# Altium PCB PCB-MAKEY_MAKEY_PTITTEAM_v1.4.PcbDoc
Units mil, origin at the board's own origin, x right, y up, seen from the top; angles counter-clockwise.
Board outline 3500 x 1950 mil, 2 copper layers (Top Layer, Bottom Layer); 49 components, 59 nets, 156 pads, 64 vias.
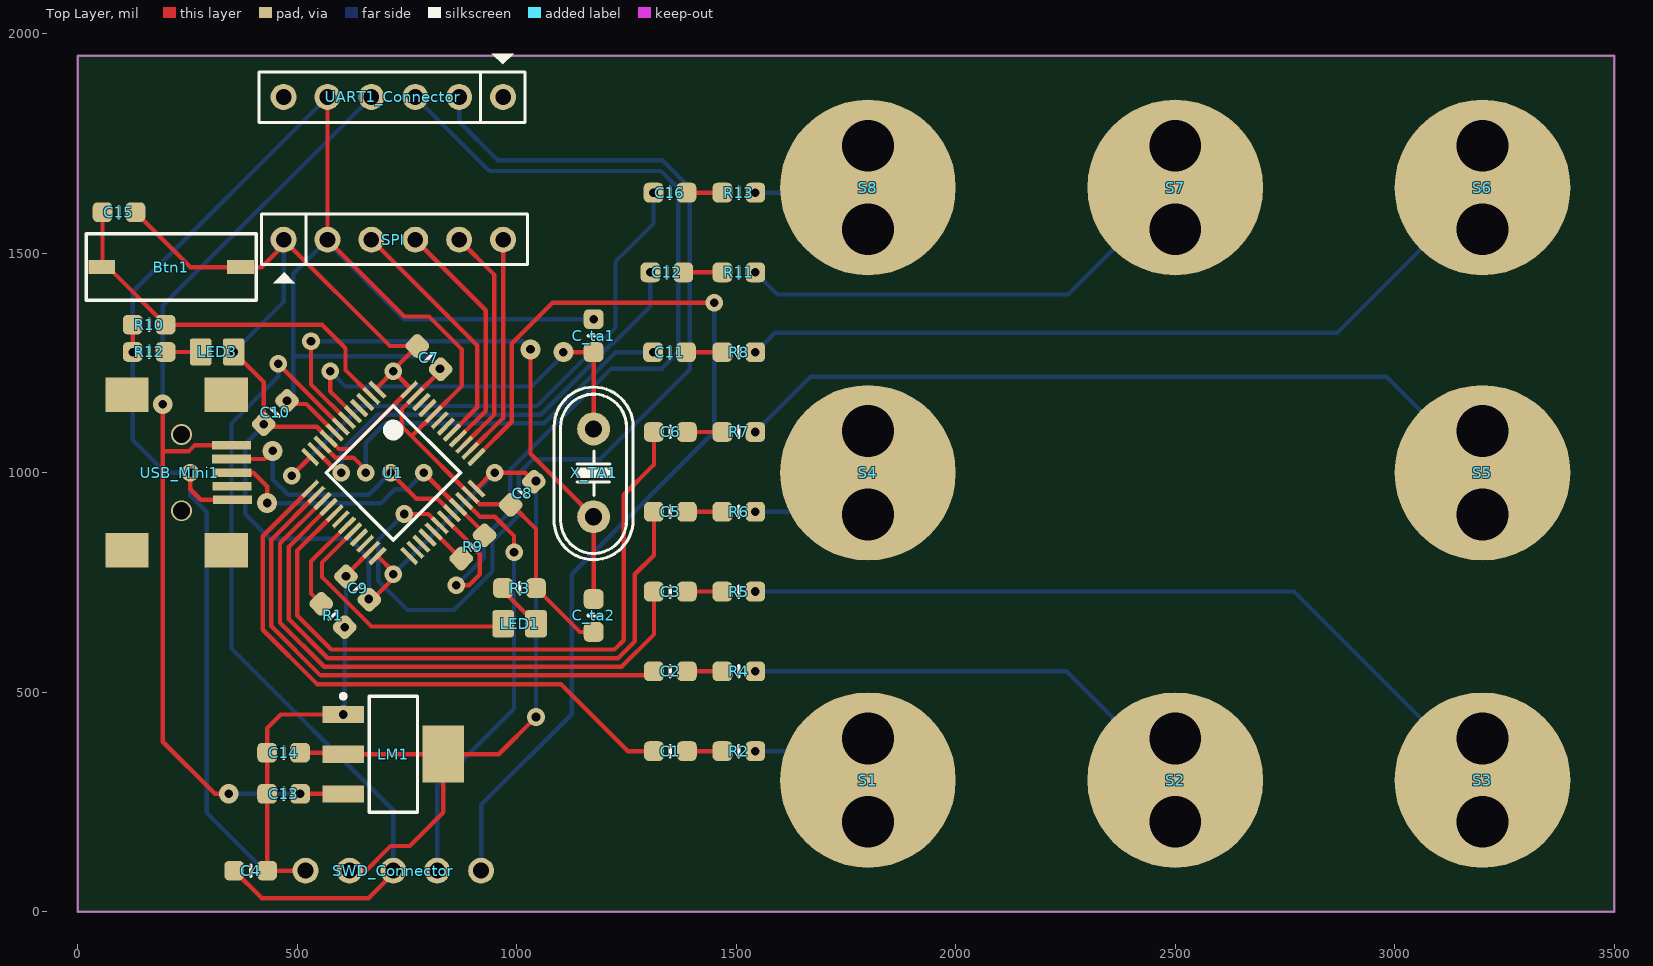
[diagram p0: Top Layer view]
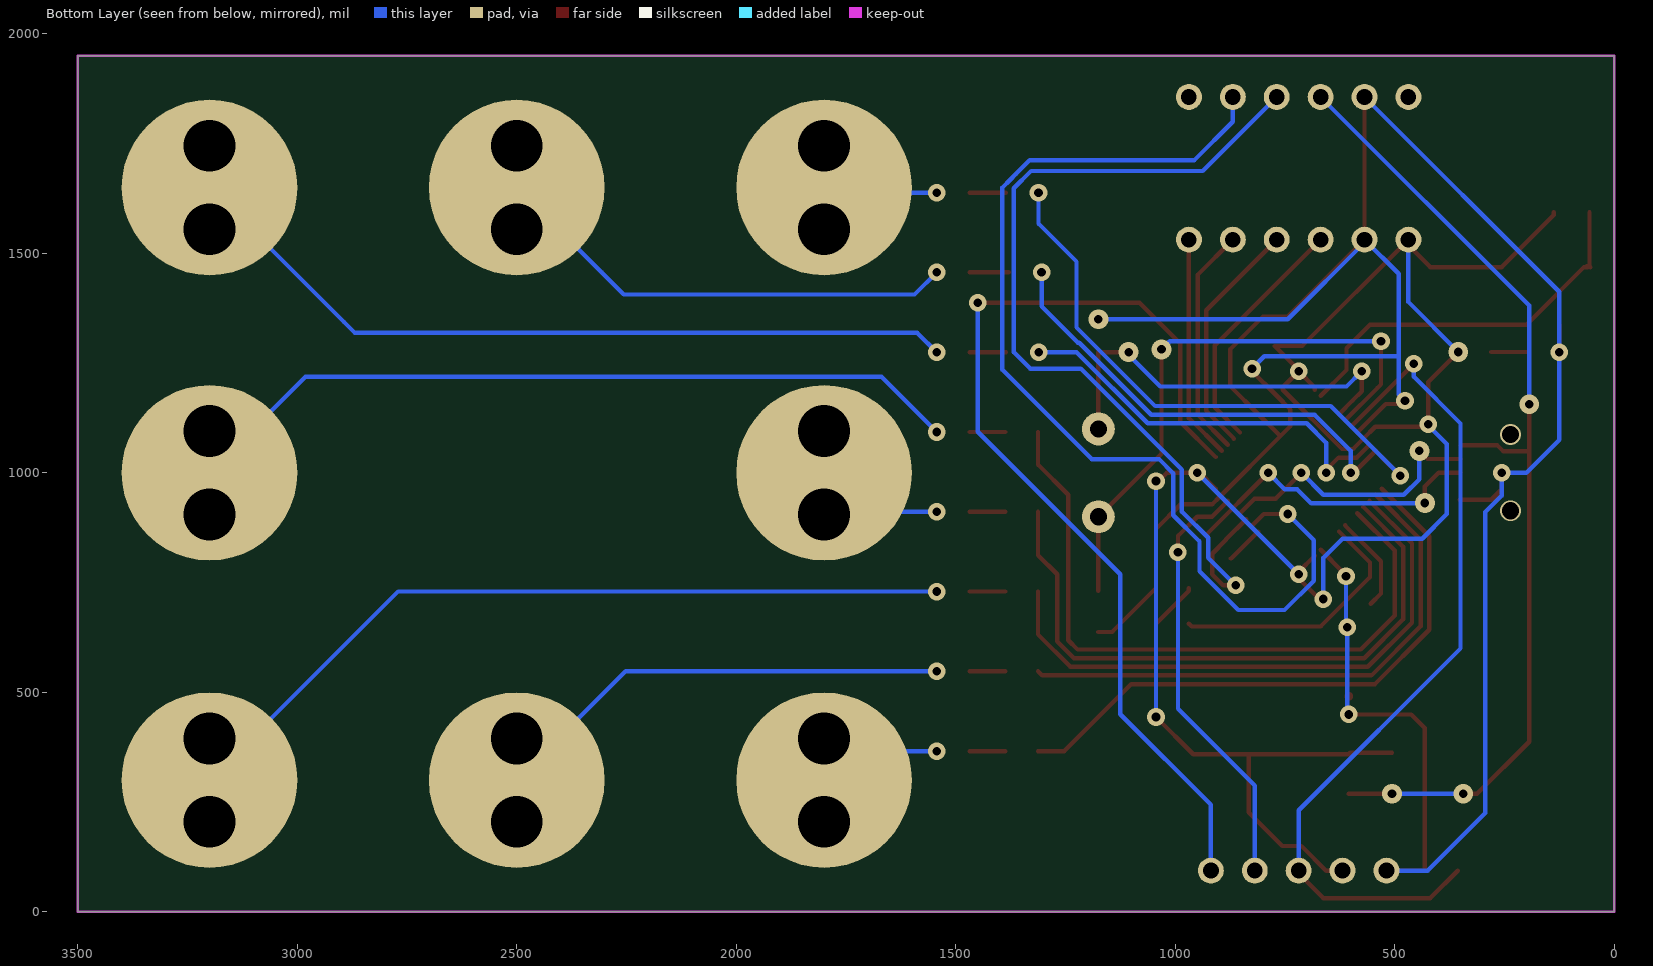
[diagram p1: Bottom Layer view, seen from below]

## Layer stack, top to bottom
Top Solder: solder mask 0.4, Solder Resist, Dk 3.5
Top Layer: signal copper 1.4
Dielectric1: dielectric 12.6, FR-4, Dk 4.8
Bottom Layer: signal copper 1.4
Bottom Solder: solder mask 0.4, Solder Resist, Dk 3.5

## Board outline
0,1950 0,0 3500,0 3500,1950 0,1950

## Design rules (kind name [scope] priority, off if disabled: settings)
Clearance [All] p1: gap=9.68
PolygonConnect [All] p1: connectstyle=Relief reliefconductorwidth=10 reliefentries=4 polygonreliefangle="90 Angle" airgapwidth=10
RoutingVias [All] p1: holewidth=28 width=50 viastyle="Through Hole" minholewidth=28 minwidth=50 maxholewidth=28 maxwidth=50
SolderMaskExpansion [All] p1: expansion=4
Width [All] p1: maxlimit=10 minlimit=10 preferedwidth=10
30 further rules are at their usual default settings.

## Components (designator, comment, footprint, x,y, rotation, side; value= is the part's Value field where it differs from the comment)
Btn1 "Function" Button_SMD_2pin 212.5,1468.75 r0 top
C1 "104" CAP-0603 1350,366.05 r0 top
C2 "104" CAP-0603 1350,547.81 r0 top
C3 "104" CAP-0603 1350,729.57 r0 top
C4 "104" CAP-0603 393.75,93.75 r0 top
C5 "104" CAP-0603 1350,911.33 r0 top
C6 "104" CAP-0603 1350,1093.09 r0 top
C7 "1uF" CAP-0603 800,1262.5 r135 top
C8 "1uF" CAP-0603 1012.5,953.42 r225 top
C9 "1uF" CAP-0603 637.5,737.5 r315 top
C10 "1uF" CAP-0603 450,1137.5 r45 top
C11 "104" CAP-0603 1348,1274.85 r0 top
C12 "104" CAP-0603 1342,1456.61 r0 top
C13 "104" CAP-0603 468.75,268.75 r0 top
C14 "104" CAP-0603 468.75,362.5 r0 top
C15 "104" CAP-0603 93.75,1593.75 r0 top
C16 "104" CAP-0603 1349,1638.37 r0 top
C_ta1 "22pF" CAP-0603 1175,1312.5 r90 top
C_ta2 "22pF" CAP-0603 1175,675 r270 top
LED1 "color" LED-0805 1006.25,656.25 r0 top
LED3 "color" LED-0805 317.44,1275.35 r180 top
LM1 "LM1117" SOT223-4N 718.75,358.99 r0 top
R1 "0R" RES-0603 581.25,675 r135 top
R2 "0R" RES-0603 1506,366.05 r0 top
R3 "1k2" RES-0603 1006.25,737.5 r180 top
R4 "0R" RES-0603 1506,547.81 r0 top
R5 "0R" RES-0603 1506,729.57 r0 top
R6 "0R" RES-0603 1506,911.33 r0 top
R7 "0R" RES-0603 1506,1093.09 r0 top
R8 "0R" RES-0603 1506,1274.85 r0 top
R9 "1k5" RES-0603 900,831.25 r225 top
R10 "10k" RES-0603 162.5,1337.5 r0 top
R11 "0R" RES-0603 1506,1456.61 r0 top
R12 "1k2" RES-0603 162.44,1275.35 r0 top
R13 "0R" RES-0603 1506,1638.37 r0 top
S1 "C_Sensor" SOP2 1800,300 r0 top
S2 "C_Sensor" SOP2 2500,300 r0 top
S3 "C_Sensor" SOP2 3200,300 r0 top
S4 "C_Sensor" SOP2 1800,1000 r0 top
S5 "C_Sensor" SOP2 3200,1000 r0 top
S6 "C_Sensor" SOP2 3200,1650 r0 top
S7 "C_Sensor" SOP2 2500,1650 r0 top
S8 "C_Sensor" SOP2 1800,1650 r0 top
SPI "" JP6 468.75,1531.25 r0 top
SWD_Connector "" JP_5 718.75,93.75 r180 top
U1 "STM32F103C8T6" LQFP48_N 718.75,1000 r315 top
UART1_Connector "Connector" JP6 968.75,1856.25 r180 top
USB_Mini1 "" Micro_USB 350,1062.5 r270 top
X_TA1 "8Mhz" XT2 1175,1000 r90 top

## Footprints (in the part's own frame and the unit in brackets; to place one, negate y for a bottom-side part, rotate by r counter-clockwise, add the part's x,y. Pads: shape width x height; smd on the part's side, far side on the other; paste and mask are expansions set on the pad)
Button_SMD_2pin [mm] "Button smd 2pin"
  rect 1.55x0.8 smd: 1(-4.013,0) 2(4.013,0)
  silkscreen extent -4.9,-1.93 4.93,1.93, body extent -4.05,-1.8 3.95,1.8, height 2.53
CAP-0603 [mil] "Chip Capacitor; Body 2 x 1.2 mm (LxW typ)"
  rrect50% 45x45 smd: 1(-37.5,0) 2(37.5,0)
  silkscreen extent 0,-12 0,13, body extent -39,-24 39,24, height 28
JP6 [mm] "JP6"
  round 1.5 hole 0.9: 1(0,0) 2(2.54,0) 3(5.08,0) 4(7.62,0) 5(10.16,0) 6(12.7,0)
  silkscreen extent -1.27,-2.51 14.12,1.47, body extent -1.22,-1.27 13.92,1.23, height 8.22
JP_5 [mm]
  round 1.5 hole 0.914: 1(-5.08,0) 2(-2.54,0) 3(0,0) 4(2.54,0) 5(5.08,0)
  body extent -6.3,-1.36 6.3,1.14, height 8.22
LED-0805 [mil] "Chip LED; Body 2 x 1.2 mm (LxW typ)"
  rrect25% 49.27x61.77 smd: 1(-37.5,0) 2(37.5,0)
  body extent -39,-25 39,25, height 31
LQFP48_N [mm] "Thin QFP, 48-Leads, Body 7x7mm, Pitch 0.5mm, IPC Medium Density"
  rrect25% 1.27x0.254 smd: 1(-4.05,2.75) 2(-4.05,2.25) 3(-4.05,1.75) 4(-4.05,1.25) 5(-4.05,0.75) 6(-4.05,0.25) 7(-4.05,-0.25) 8(-4.05,-0.75) 9(-4.05,-1.25) 10(-4.05,-1.75) 11(-4.05,-2.25) 12(-4.05,-2.75) 25(4.05,-2.75) 26(4.05,-2.25) 27(4.05,-1.75) 28(4.05,-1.25) 29(4.05,-0.75) 30(4.05,-0.25) 31(4.05,0.25) 32(4.05,0.75) 33(4.05,1.25) 34(4.05,1.75) 35(4.05,2.25) 36(4.05,2.75)
  rrect25% 0.254x1.27 smd: 13(-2.75,-4.05) 14(-2.25,-4.05) 15(-1.75,-4.05) 16(-1.25,-4.05) 17(-0.75,-4.05) 18(-0.25,-4.05) 19(0.25,-4.05) 20(0.75,-4.05) 21(1.25,-4.05) 22(1.75,-4.05) 23(2.25,-4.05) 24(2.75,-4.05) 37(2.75,4.05) 38(2.25,4.05) 39(1.75,4.05) 40(1.25,4.05) 41(0.75,4.05) 42(0.25,4.05) 43(-0.25,4.05) 44(-0.75,4.05) 45(-1.25,4.05) 46(-1.75,4.05) 47(-2.25,4.05) 48(-2.75,4.05)
  silkscreen extent -2.75,-2.75 2.75,2.75, body extent -3.5,-3.5 3.5,3.5, height 1.6
Micro_USB [mm] "Micro usb connector"
  rect 2x2.5 smd: 0(-2.929,-6.045) 0(-2.925,-0.305) 0(6.071,-6.045) 0(6.075,-0.305)
  rect 0.5x2.25 smd: 1(0,0) 2(0.787,0.013) 3(1.575,0.025) 4(2.362,0.038) 5(3.15,0.051)
  body extent -3.78,-8.83 6.92,0.37, height 3.95
RES-0603 [mil] "Chip Resistor; Body 2 x 1.2 mm (LxW typ)"
  rrect50% 45x45 smd: 1(-37.5,0) 2(37.5,0)
  silkscreen extent 0,-12 0,12, body extent -39,-24 39,24, height 28
SOP2 [mil]
  round 400 all layers, no hole: 1(0,0)
SOT223-4N [mm]
  rect 2.4x1 smd: 1(-2.9,2.3) 2(-2.9,0) 3(-2.9,-2.3)
  rect 2.4x3.3 smd: 4(2.9,0)
  Top Layer circle w0.25: c-2.9,3.35 r0.125
  silkscreen extent -3.02,-3.35 1.4,3.47, body extent -3.39,-3.27 3.5,3.23, height 1.72
XT2 [mm] "Footpin for Crystal 2 pin"
  round 1.905 hole 1: 1(-2.54,0) 2(2.54,0)
  silkscreen extent -5.03,-2.29 4.96,2.29, body extent -5.93,-2.36 5.42,2.29, height 3.5

## Part data
Btn1: library part Button_SMD_2pin, "Switch button 2 pin"
C1 C2 C3 C4 C5 C6 C9 C10 C11 C13 C14 C15: library part CM, "Cap SMD"
C7 C8 C12 C16 C_ta1 C_ta2: library part CN0, "Cremic For Xtal 1pF => 100pF"
LED1 LED3: library part Led_SMD, "Led smd"
LM1: "3v3"
R1 R2 R3 R4 R5 R6 R7 R8 R10 R11 R12 R13: library part Res_SMD_0603, "Resistor smd 0603 type"
R9: library part R, "Resistor 1/4W"
SPI: library part SPI_Connector
SWD_Connector: library part Load_Program
U1: "STM32 ARM-based 32-bit MCU with 64 Kbytes Flash, 48-pin LQFP, Industrial Temperature"
UART1_Connector: library part USB2Com_Conn, "Connector to USB2Com module"
USB_Mini1: library part USB_M
X_TA1: library part XT2, "Crystal For all Crystal 2pin."

## Via types
v1: diameter 40, hole 19.68, Top Layer to Bottom Layer, tented both sides, 37 vias
v2: diameter 130, hole 118.11, Top Layer to Bottom Layer, 16 vias
v3: diameter 45, hole 19.68, Top Layer to Bottom Layer, 9 vias
v4: diameter 47.24, hole 39.37, Top Layer to Bottom Layer, tented both sides, 2 vias

## Nets (pads, with @x,y where several pads share a name; then routed paths per layer and width w, separated by ;. In a path a pad name is that pad's centre, name@x,y a point inside that pad or via, vN(x,y) a via of type N, cw(c..) or ccw(c..) an arc to the next point about the centre after c; other vN are vias at no path point)
GND: C4.2 C7.1 C8.2 C9.1 C10.2 C13.1 C14.1 C_ta1.2 C_ta2.2 LM1.1 R1.1 R3.1 R10.1 R12.1 SPI.2 SWD_Connector.5 U1.8 U1.23 U1.35 U1.44 U1.47 UART1_Connector.5 USB_Mini1.5 | length 6841
  Top Layer w10: R12.1 125,1275.41 R10.1 ; v1(256.25,1000) 256.25,962.5 280.25,938.5 USB_Mini1.5 ; v1(476.52,1164.02) 483.81,1156.73 520.27,1156.73 U1.8 ; SWD_Connector.5 C4.2 C13.1 C14.1 431.25,418.75 462.04,449.54 v1(604.58,449.54) ; UART1_Connector.5 SPI.2 743.75,1356.25 800,1356.25 875,1281.25 875,1198.01 U1.44 762.5,1085.51 762.5,1081.52 ; v1(610.98,764.02) C9.1@620.27,754.73 ; C9.1@617.23,764.02 617.23,773.2 U1.23 ; C7.1@827.99,1234.51 U1.47 737.5,1144.02 737.5,1106.52 762.5,1081.52 ; C_ta2.2 1143.75,637.5 R3.1 1043.75,828.22 1043.75,871.97 987.28,928.43 915.6,928.43 914.81,929.23 899.9,944.12 U1.35 762.5,1081.52
  Bottom Layer w10: v1(476.52,1164.02) 490.93,1178.43 490.93,1262.5 ; SWD_Connector.5 425,93.75 293.75,225 293.75,910.73 256.25,948.23 v1(256.25,1000) 200,1000 125,1075 v1(125,1275) 125,1412.5 UART1_Connector.5 ; SPI.2@568.75,1525 743.75,1350 1131.25,1350 v3(1175,1350) ; SPI.2 490.93,1453.43 490.93,1262.5 ; v1(604.58,449.54) 607.77,452.73 v1(607.77,648.48) 610.98,651.7 v1(610.98,764.02) ; v1(825,1237.5) 797.18,1265.32 733.72,1265.32 733.11,1265.93 704.39,1265.93 703.78,1265.32 589.97,1265.32 589.36,1265.93 560.64,1265.93 560.03,1265.32 493.75,1265.32 490.93,1262.5
NetC1_2: C1.2 R2.1 | length 81
  Top Layer w10: C1.2 R2.1
NetC2_2: C2.2 R4.1 | length 81
  Top Layer w10: C2.2 R4.1
NetC3_2: C3.2 R5.1 | length 81
  Top Layer w10: C3.2 R5.1
NetC5_2: C5.2 R6.1 | length 81
  Top Layer w10: C5.2 R6.1
NetC6_2: C6.2 R7.1 | length 81
  Top Layer w10: C6.2 R7.1
NetC11_2: C11.2 R8.1 | length 83
  Top Layer w10: C11.2 R8.1
NetC12_2: C12.2 R11.1 | length 89
  Top Layer w10: C12.2 R11.1
NetC16_2: C16.2 R13.1 | length 82
  Top Layer w10: C16.2 R13.1
NetLED1_2: LED1.2 R3.2 | length 112.3
  Top Layer w10: R3.2 968.75,731.25 LED1.2
NetLED3_2: LED3.2 R12.2 | length 80
  Top Layer w10: R12.2 LED3.2
NetR2_2: R2.2 S1.1 | length 283.9
  Bottom Layer w10: v1(1543.5,366.05) 1733.95,366.05 S1.1
  other v2: 1800,205 1800,395
NetR4_2: R4.2 S2.1 | length 1409.6
  Bottom Layer w10: v1(1543.5,547.81) 2252.19,547.81 ; 2252.19,547.81 S2.1 2252.19,547.81
  other v2: 2500,205 2500,395
NetR5_2: R5.2 S3.1 | length 2441.9
  Bottom Layer w10: v1(1543.5,729.57) 2770.43,729.57 ; 2770.43,729.57 S3.1 2770.43,729.57
  other v2: 3200,205 3200,395
NetR6_2: R6.2 S4.1 | length 418.6
  Bottom Layer w10: v1(1543.5,911.33) S4.1@1711.33,911.33 ; S4.1@1711.33,911.33 S4.1 S4.1@1711.33,911.33
  other v2: 1800,905 1800,1095
NetR7_2: R7.2 S5.1 | length 1799.2
  Bottom Layer w10: v1(1543.5,1093.09) 1669.16,1218.75 2981.25,1218.75 S5.1
  other v2: 3200,905 3200,1095
NetR8_2: R8.2 S6.1 | length 2245
  Bottom Layer w10: v1(1543.5,1274.85) 1587.4,1318.75 2868.75,1318.75 S6.1 2893.75,1343.75
  other v2: 3200,1555 3200,1745
NetR11_2: R11.2 S7.1 | length 1351.8
  Bottom Layer w10: v1(1543.5,1456.61) 1593.86,1406.25 2256.25,1406.25 S7.1 2306.61,1456.61
  other v2: 2500,1555 2500,1745
NetR13_2: R13.2 S8.1 | length 261.3
  Bottom Layer w10: v1(1543.5,1638.37) 1788.37,1638.37 S8.1
  other v2: 1800,1555 1800,1745
NRST: C4.1 SWD_Connector.3 U1.7 | length 1972.9
  Top Layer w10: C4.1 418.75,31.25 662.5,31.25 718.75,87.5 SWD_Connector.3 ; v1@456.25,1250 v1(456.25,1248.58) U1.7
  Bottom Layer w10: v1(456.25,1248.58) 456.25,1218.75 350,1112.5 350,600 718.75,231.25 SWD_Connector.3
OSC_IN: C_ta1.1 U1.5 X_TA1.2 | length 944.6
  Top Layer w10: v1(575,1231.25) 575,1185.51 594.87,1165.64 U1.5 ; v3(1106.25,1275) C_ta1.1 1175,1243.75 X_TA1.2
  Bottom Layer w10: v1(575,1231.25) 609.68,1196.57 1034.07,1196.57 1106.25,1268.75 v3(1106.25,1275)
OSC_OUT: C_ta2.1 U1.6 X_TA1.1 | length 1331.4
  Top Layer w10: v1(531.25,1300) 531.25,1201.42 540.32,1192.35 U1.6 ; v3(1031.25,1281.25) 1031.25,1043.75 X_TA1.1 C_ta2.1@1175,731.25
  Bottom Layer w10: v1(531.25,1300) 1012.5,1300 v3(1031.25,1281.25)
PA0: C11.1 U1.10 | length 937.5
  Top Layer w10: U1.10 586.63,1034.68 627.82,1034.68 656.25,1006.25 v1(656.25,1000)
  Bottom Layer w10: v1(656.25,1000) 656.25,1068.75 700.32,1112.82 1062.82,1112.82 1224.85,1274.85 v1(1310.5,1274.85)
PA1: C12.1 U1.11 | length 1133.9
  Top Layer w10: v1(600,1000) 600,994.03 v1@599.72,993.75 ; v1@599.72,993.75 U1.11 596.74,996.74 v1@599.72,993.75
  Bottom Layer w10: v1(600,1000) 600,1050 682.5,1132.5 1054.67,1132.5 1218.77,1296.6 1221.6,1296.6 1304.5,1379.5 v1(1304.5,1456.61)
PA2: C16.1 U1.12 | length 1280.1
  Top Layer w10: v1(487.5,993.75) 529.45,1035.7 U1.12
  Bottom Layer w10: v1(487.5,993.75) 645.93,1152.18 1045.93,1152.18 1225,1331.25 1225,1481.25 1311.5,1567.75 v1(1311.5,1638.37)
PA3: C1.1 U1.13 | length 1371.9
  Top Layer w10: U1.13 421.28,855.64 421.28,642.39 544.92,518.75 1100,518.75 1252.7,366.05 C1.1
PA4: C2.1 U1.14 | length 1263.6
  Top Layer w10: U1.14 440.96,847.49 440.96,650.54 553.07,538.43 1303.12,538.43 C2.1
PA5: C3.1 U1.15 | length 1339.1
  Top Layer w10: U1.15 460.64,839.33 460.64,658.7 561.23,558.11 1238.77,558.11 1312.5,631.84 C3.1
PA6: C5.1 U1.16 | length 1447.5
  Top Layer w10: U1.16 480.32,831.17 480.32,666.85 569.38,577.79 1230.62,577.79 1268.75,615.92 1268.75,768.75 1312.5,812.5 C5.1
PA7: C6.1 U1.17 | length 1555.9
  Top Layer w10: U1.17 500,823.01 500,675 577.53,597.47 1222.47,597.47 1243.75,618.75 1243.75,950 1312.5,1018.75 C6.1
PA13: SWD_Connector.2 U1.34 | length 981.5
  Top Layer w10: U1.34 916.18,900 950,900 993.75,856.25 v1(993.75,818.75)
  Bottom Layer w10: SWD_Connector.2 818.75,287.5 993.75,462.5 v1(993.75,818.75)
PA14: SWD_Connector.1 U1.37 | length 2305.6
  Top Layer w10: U1.37 988.43,1116.57 988.43,1294.68 1081.25,1387.5 v1(1450,1387.5)
  Bottom Layer w10: SWD_Connector.1 918.75,243.75 1125,450 1125,768.75 1450,1093.75 v1(1450,1387.5)
PA15: SPI.6 U1.38 | length 512
  Top Layer w10: U1.38 968.75,1124.73 SPI.6
PB0: U1.18
PB1: R1.2 U1.19 | length 222.3
  Top Layer w10: R1.2 531.25,725 531.25,798.58 U1.19
PB2: LED1.1 U1.20 | length 594.8
  Top Layer w10: U1.20 556.25,795.74 556.25,762.5 668.75,650 962.5,650 LED1.1
PB3: SPI.5 U1.39 | length 529
  Top Layer w10: SPI.5 949.07,1450.93 949.07,1132.88 U1.39
PB4: SPI.4 U1.40 | length 546
  Top Layer w10: SPI.4 929.39,1370.61 929.39,1141.04 U1.40
PB5: SPI.3 U1.41 | length 562.9
  Top Layer w10: SPI.3 909.71,1290.29 909.71,1149.2 U1.41
PB6: U1.42
PB7: U1.43
PB8: U1.45
PB9: U1.46
PB10: U1.21
PB11: U1.22
PB12: U1.25
PB13: U1.26
PB14: U1.27
PB15: U1.28
PC13: Btn1.1 C15.1 R10.2 U1.2 | length 886.7
  Top Layer w10: Btn1.1 56.25,1470.5 C15.1 ; Btn1.1@62.5,1470.5 60.75,1468.75 68.75,1468.75 R10.2 506.53,1337.5 556.25,1337.5 609.68,1284.07 609.68,1234.34 U1.2
PC14: U1.3
PC15: U1.4
USART1_RX: U1.31 UART1_Connector.3 | length 2087.5
  Top Layer w10: U1.31 884.68,847.99 884.68,847.03 915.78,815.93 915.78,768.62 890.91,743.75 v1(862.5,743.75)
  Bottom Layer w10: UART1_Connector.3 937.5,1687.5 1328.42,1687.5 1367.82,1648.1 1367.82,1275 1330.32,1237.5 1215.33,1237.5 984.68,1006.85 984.68,911.58 925,851.9 925,806.25 v1(862.5,743.75)
USART1_TX: U1.30 UART1_Connector.2 | length 2386.4
  Top Layer w10: v1(743.75,906.25) 798.58,906.25 U1.30
  Bottom Layer w10: v1(743.75,906.25) 684.07,846.57 684.07,754.39 750.96,687.5 856.25,687.5 944.68,775.93 944.68,843.75 1004.36,903.43 1004.36,998.7 1036.91,1031.25 1190.33,1031.25 1393.75,1234.67 1393.75,1650 1375.97,1667.78 1362.5,1681.25 1331.25,1712.5 956.25,1712.5 868.75,1800 UART1_Connector.2
USB_5V: C13.2 LM1.3 UART1_Connector.4 USB_Mini1.1 | length 2395
  Top Layer w10: v3(343.75,268.75) 312.5,268.75 193.75,387.5 v3(193.75,1156.25) 193.75,1048.81 252.29,1048.81 265.98,1062.5 USB_Mini1.1 ; v3(506.25,268.75) 604.27,268.75 LM1.3
  Bottom Layer w10: v3(193.75,1156.25) 193.75,1381.25 UART1_Connector.4 ; v3(343.75,268.75) v3(506.25,268.75)
USB_DISC: R9.2 U1.29 | length 88.4
  Top Layer w10: U1.29 872.25,804.73 R9.2
USBDM: U1.32 USB_Mini1.2 | length 647.5
  Top Layer w10: USB_Mini1.2 425.25,1031.5 v3(443.75,1050) ; v1(712.5,1000) 771.34,941.16 819.35,941.16 U1.32
  Bottom Layer w10: v3(443.75,1050) 443.75,985.48 479.23,950 662.5,950 v1(712.5,1000)
USBDP: R9.1 U1.33 USB_Mini1.3 | length 912.1
  Top Layer w10: USB_Mini1.3 399.5,1000.5 431.25,968.75 v3(431.25,931.25) ; R9.1 R9.1@926.52,861.82 ; R9.1@926.52,861.82 v1(788.34,1000) R9.1@926.52,861.82
  Bottom Layer w10: v3(431.25,931.25) 432.18,930.32 690.24,930.32 722.42,962.5 750.84,962.5 v1(788.34,1000)
VCC: Btn1.2 C7.2 C8.1 C9.2 C10.1 C14.2 C15.2 LED3.1 LM1.2 LM1.4 SPI.1 SWD_Connector.4 U1.1 U1.9 U1.24 U1.36 U1.48 | length 4708.8
  Top Layer w10: C15.2@137.5,1593.75 137.5,1587.5 256.25,1468.75 376.75,1468.75 418.75,1468.75 468.75,1518.75 SPI.1 710.98,1289.02 C7.2 718.75,1234.28 v1(718.75,1231.25) ; LED3.1@354.94,1286.19 v3(354.94,1275.35) 423.48,1206.81 v1(423.48,1110.98) 429.73,1104.73 467.23,1104.73 544.42,1104.73 U1.9 594.79,1054.36 620,1054.36 U1.48 754.94,1195.06 v1(718.75,1231.25) ; C14.2 601.07,362.5 LM1.2 LM1.4 ; SWD_Connector.4 656.23,93.75 712.48,150 756.25,150 832.92,226.67 LM1.4 ; C9.2@670.27,710.98 718.75,759.47 v1(718.75,768.75) 718.75,774.51 U1.24 ; U1.1 682.56,1195.06 v1(718.75,1231.25) ; U1.36 944.24,1000 v1(950,1000) 1018.95,1000 1037.7,981.25 v1(1043.75,981.25) ; v1(1043.75,443.75) 958.99,358.99 LM1.4
  Bottom Layer w10: v3(354.94,1275.35) 468.75,1389.16 SPI.1 ; v1(423.48,1110.98) 423.48,1107.95 381.25,1065.72 381.25,906.25 437.5,850 618.75,850 662.5,806.25 v1(662.5,712.5) ; v1(718.75,768.75) v1(950,1000) ; v1(1043.75,443.75) v1(1043.75,981.25)
pads on no net: UART1_Connector.1 UART1_Connector.6 USB_Mini1.0 USB_Mini1.4
copper on no net:
  other v4: 236.43,913.89 236.43,1087.11

## Keep-outs
Keep-Out Layer:
  the board outline again, w5

## Silkscreen, mask and mechanical layers (free items; w line width, h text height)
Mechanical 13:
  lines w10: 0,1000 18.75,1000 3506.25,1000